# Altium PCB Annunciator.PcbDoc
Units mil, origin at the board's own origin, x right, y up, seen from the top; angles counter-clockwise.
Board outline 2739.72 x 2629.72 mil, 2 copper layers (Top Layer, Bottom Layer); 9 components, 15 nets, 120 pads, 0 vias.
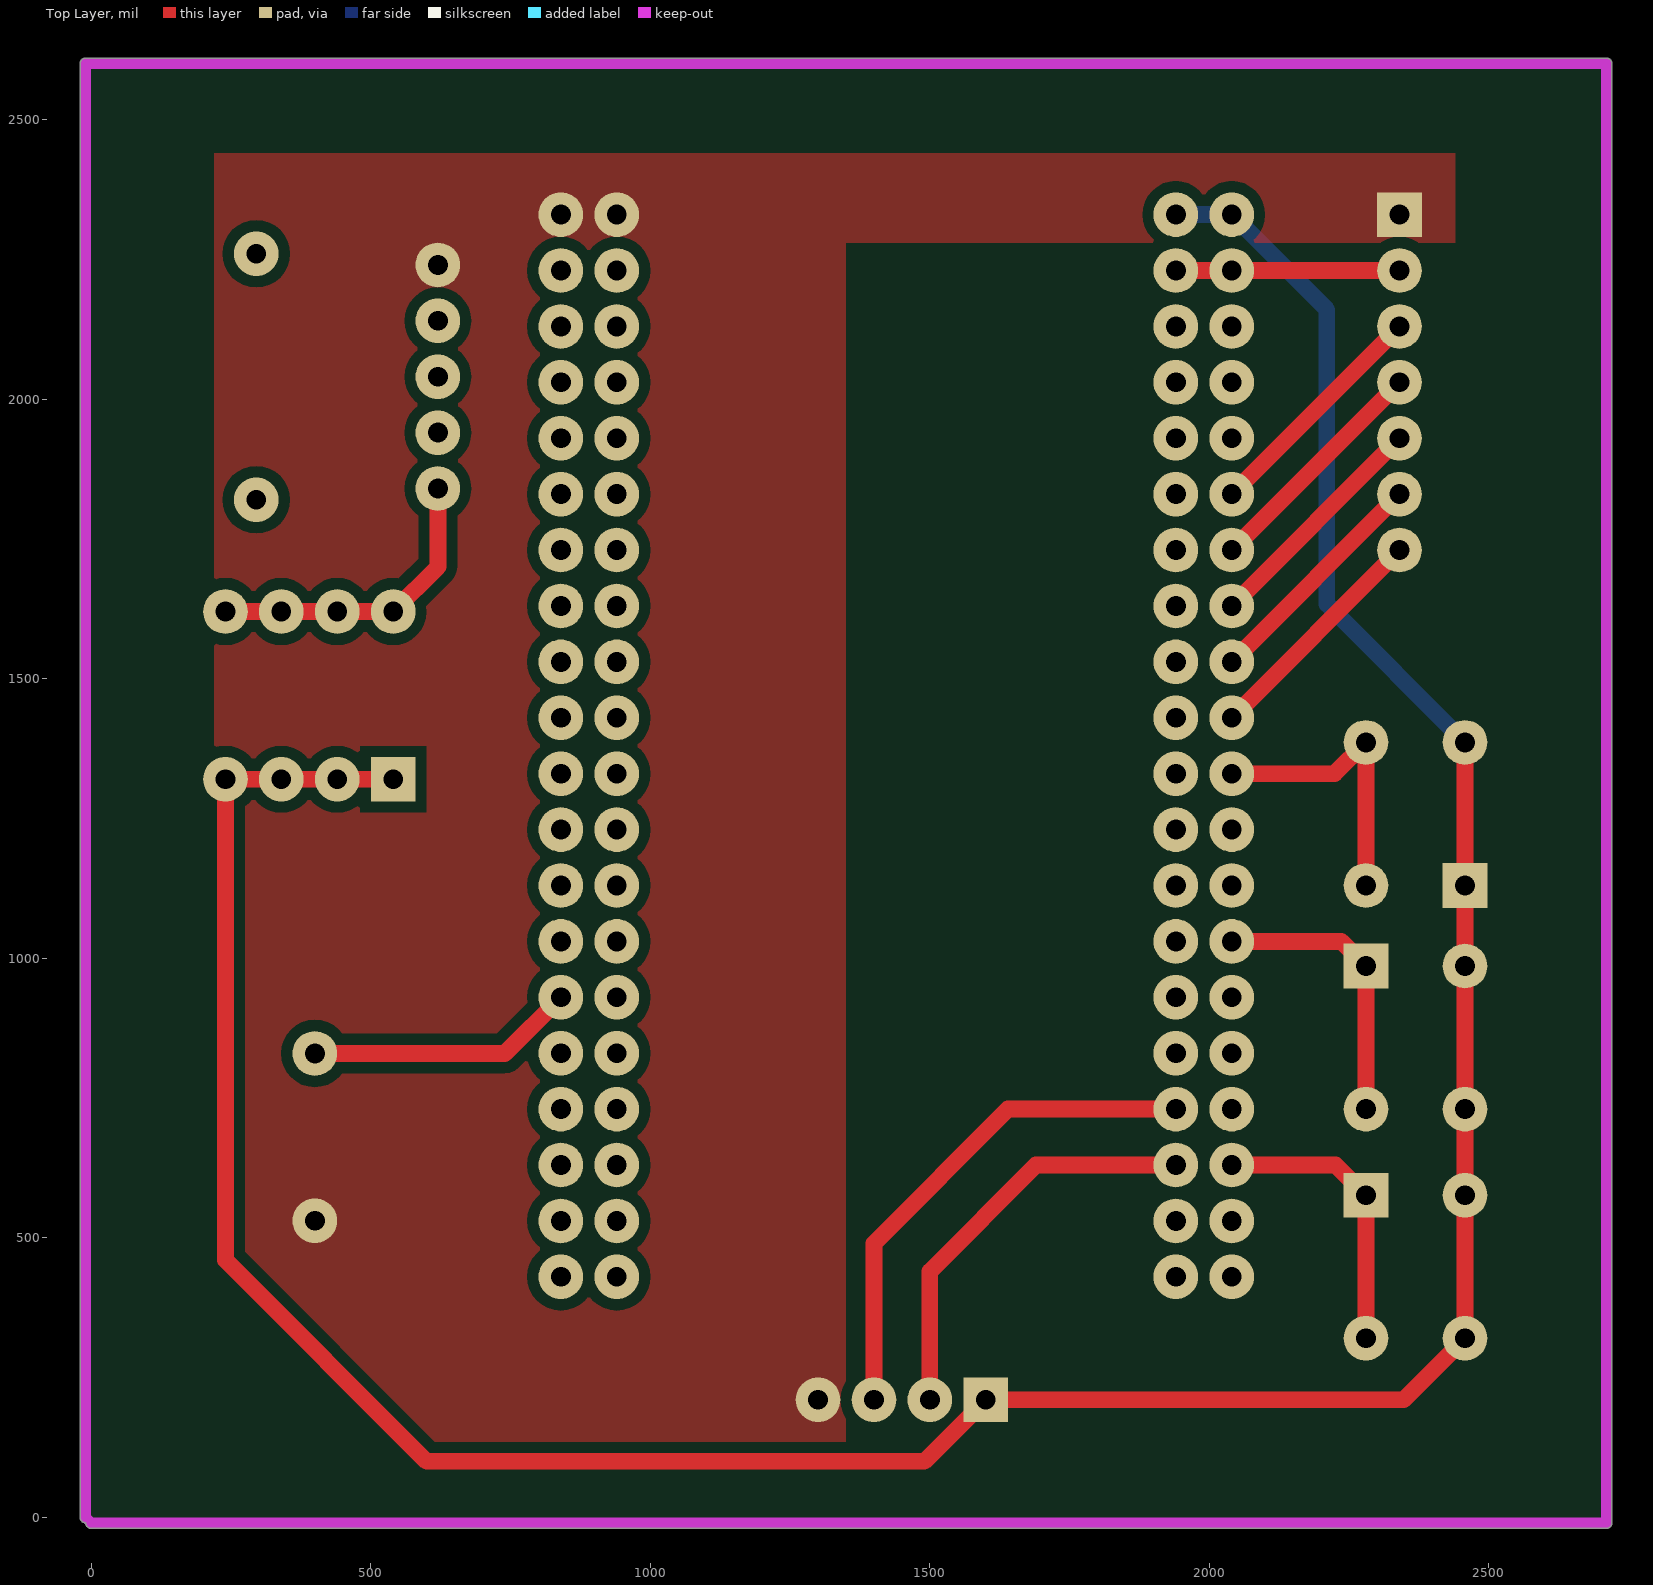
[diagram p0: Top Layer view]
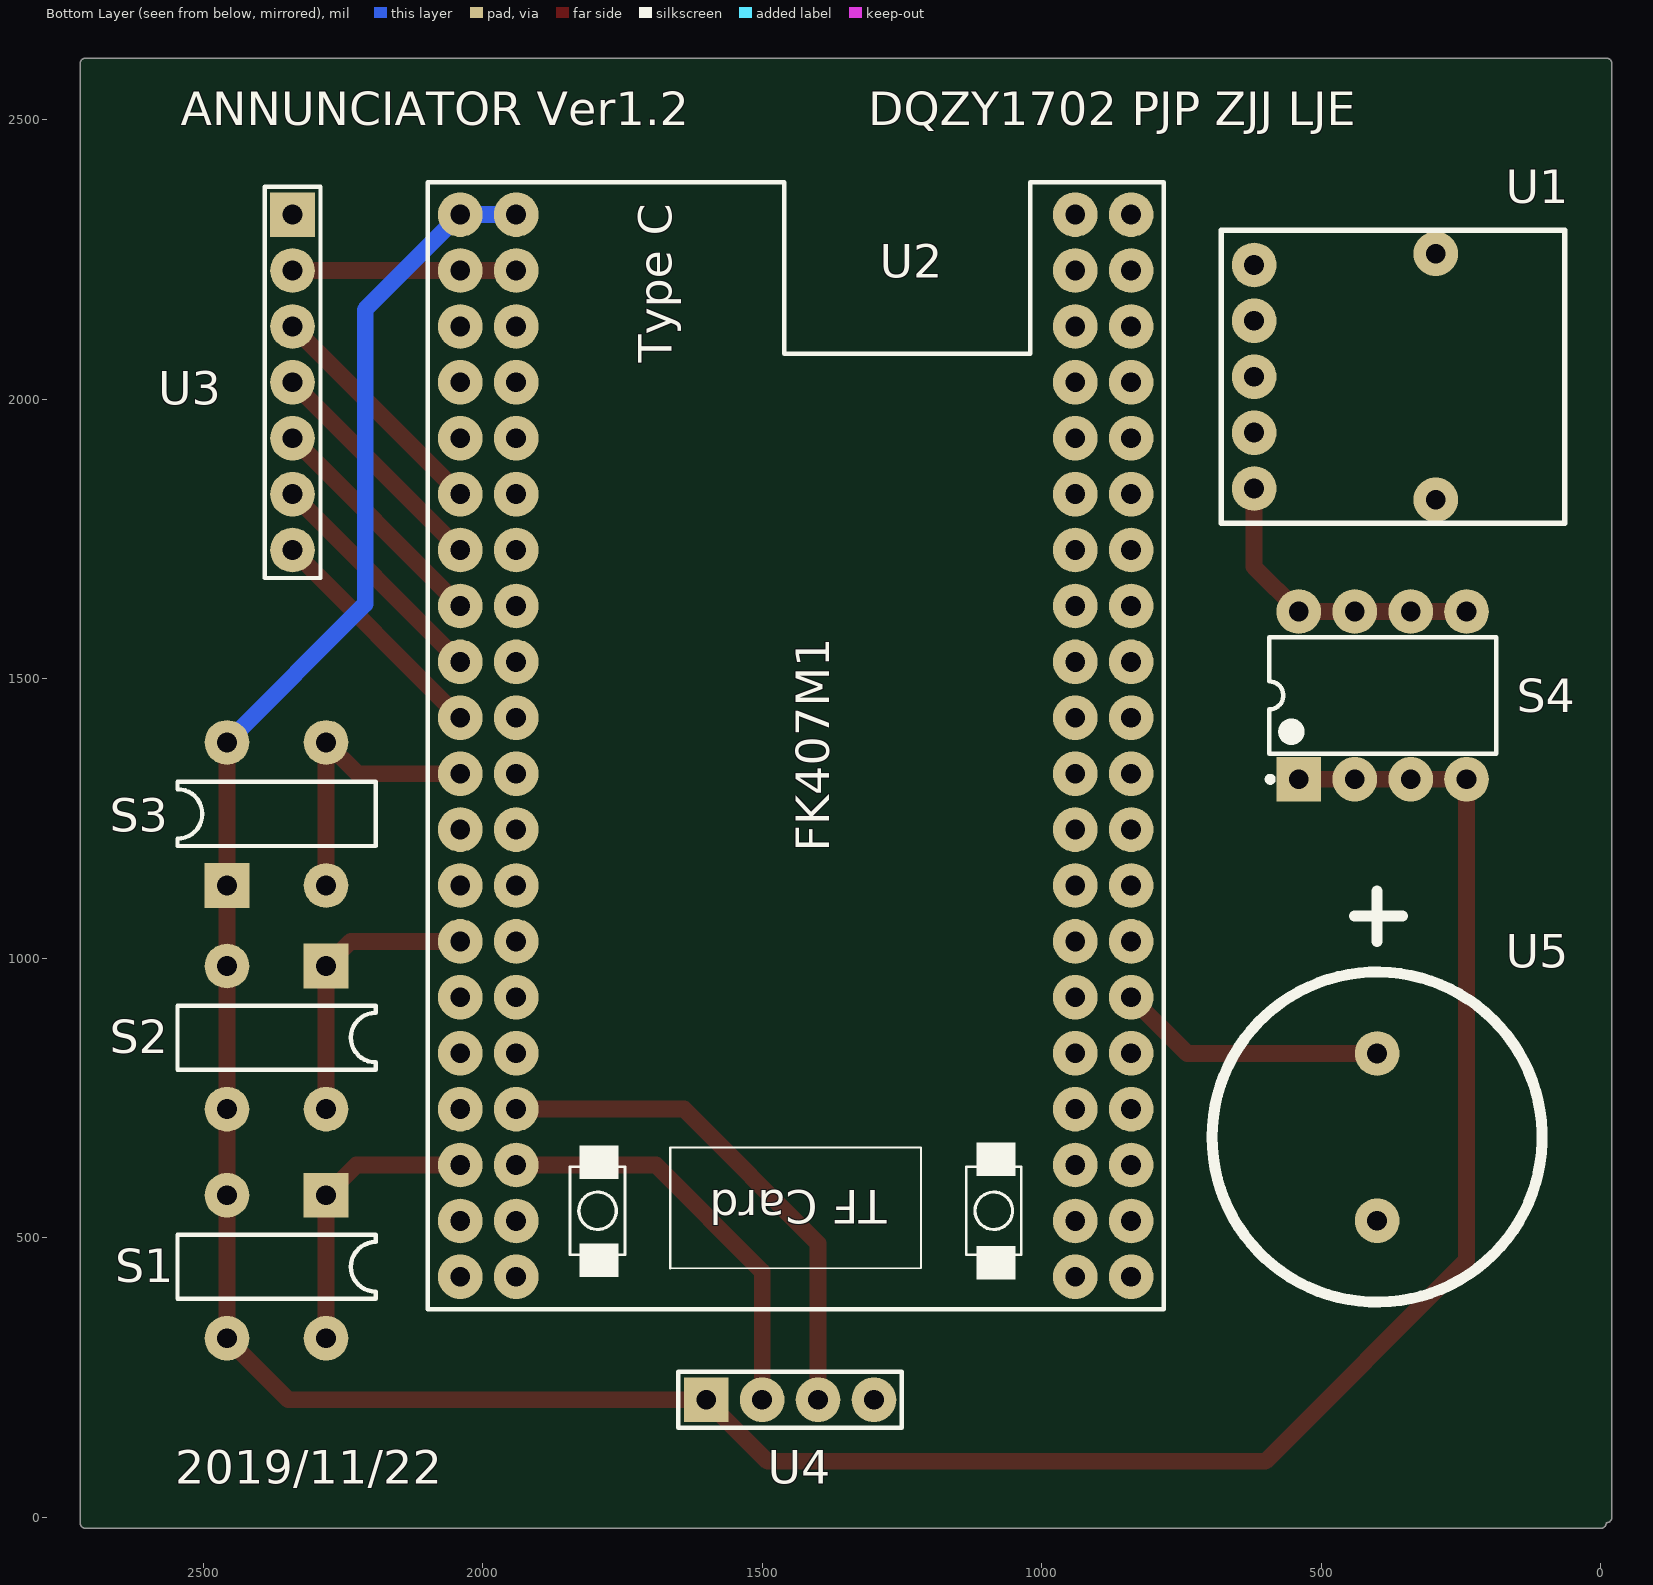
[diagram p1: Bottom Layer view, seen from below]

## Layer stack, top to bottom
Top Solder: solder mask 0.4, Solder Resist, Dk 3.5
Top Layer: signal copper 1.4
Dielectric 1: dielectric 12.6, FR-4, Dk 4.8
Bottom Layer: signal copper 1.4
Bottom Solder: solder mask 0.4, Solder Resist, Dk 3.5

## Board outline
-19.86,0 -19.86,2600 cw(c-10,2600) -10,2609.86 2710,2609.86 cw(c2710,2600) 2719.86,2600 2719.86,-10 cw(c2710,-10) 2710,-19.86 0,-19.86 cw(c0,-10) -9.86,-9.86 cw(c-10,0)

## Design rules (kind name [scope] priority, off if disabled: settings)
Clearance [All] p1: gap=10 ignorepadtopadclearanceinfootprint=FALSE except(0: Arc-Hole Track-Hole SMDPad-Hole THPad-Hole Via-Hole Fill-Hole Poly-Hole Region-Hole Text-Hole; 20: Arc-Fill Arc-Poly Arc-Region Track-Fill Track-Poly Track-Region SMDPad-Fill SMDPad-Poly SMDPad-Region THPad-Fill THPad-Poly THPad-Region)
ComponentClearance [All] p1: gap=0 collisioncheckmode=3 verticalgap=0 showdistances=FALSE
PolygonConnect [All] p1: connectstyle=Direct reliefconductorwidth=10 reliefentries=4 polygonreliefangle="90 Angle" airgapwidth=10
RoutingVias [All] p1: holewidth=28 width=50 viastyle="Through Hole" minholewidth=28 minwidth=50 maxholewidth=28 maxwidth=50
SolderMaskExpansion [All] p1: expansion=4
Width [All] p1: maxlimit=30 minlimit=5 preferedwidth=10
29 further rules are at their usual default settings.

## Components (designator, comment, footprint, x,y, rotation, side; value= is the part's Value field where it differs from the comment)
S1 "Button" Button-4Pin 2280,575.91 r270 bottom
S2 "Button" Button-4Pin 2280,985.91 r270 bottom
S3 "Button" Button-4Pin 2457.17,1130 r90 bottom
S4 "SW DIP-4" DIP-8 390,1470 r90 bottom
U1 "USB-TYPEB" "microB USB Breakout" 620,1840 r0 bottom
U2 "STM32F407VET6" FK407M1 1940,2330 r90 bottom
U3 "OLED12864" HDR1X7 2340,2330 r270 bottom
U4 "RCWL1601/HCSR04" HDR1X4 1600,210 r180 bottom
U5 "Buzzer" THDZ 400,680 r270 bottom

## Footprints (in the part's own frame and the unit in brackets; to place one, negate y for a bottom-side part, rotate by r counter-clockwise, add the part's x,y. Pads: shape width x height; smd on the part's side, far side on the other; paste and mask are expansions set on the pad)
Button-4Pin [mil]
  rect 80x80 hole 35.43: 1(0,0)
  round 80 hole 35.43: 2(0,-177.17) 3(255.91,-177.17) 4(255.91,0)
  silkscreen extent 71,-266 185,89
DIP-8 [mil] "DIP; 8 Leads; Row Spacing 7.62 mm; Pitch 2.54 mm"
  rect 80x80 hole 35.43: 1(-150,150)
  round 80 hole 35.43: 2(-150,50) 3(-150,-50) 4(-150,-150) 5(150,-150) 6(150,-50) 7(150,50) 8(150,150)
  silkscreen extent -155,-203 104,206, body extent -142,-203 142,203, height 200
FK407M1 [mil]
  round 80 hole 35.43: 1(0,-1000) 2(0,-1100) 3(-100,-1000) 4(-100,-1100) 5(-200,-1000) 6(-200,-1100) 7(-300,-1000) 8(-300,-1100) 9(-400,-1000) 10(-400,-1100) 11(-500,-1000) 12(-500,-1100) 13(-600,-1000) 14(-600,-1100) 15(-700,-1000) 16(-700,-1100) 17(-800,-1000) 18(-800,-1100) 19(-900,-1000) 20(-900,-1100) 21(-1000,-1000) 22(-1000,-1100) 23(-1100,-1000) 24(-1100,-1100) 25(-1200,-1000) 26(-1200,-1100) 27(-1300,-1000) 28(-1300,-1100) 29(-1400,-1000) 30(-1400,-1100) 31(-1500,-1000) 32(-1500,-1100) 33(-1600,-1000) 34(-1600,-1100) 35(-1700,-1000) 36(-1700,-1100) 37(-1800,-1000) 38(-1800,-1100) 39(-1900,-1000) 40(-1900,-1100) 41(0,100) 42(0,0) 43(-100,100) 44(-100,0) 45(-200,100) 46(-200,0) 47(-300,100) 48(-300,0) 49(-400,100) 50(-400,0) 51(-500,100) 52(-500,0) 53(-600,100) 54(-600,0) 55(-700,100) 56(-700,0) 57(-800,100) 58(-800,0) 59(-900,100) 60(-900,0) 61(-1000,100) 62(-1000,0) 63(-1100,100) 64(-1100,0) 65(-1200,100) 66(-1200,0) 67(-1300,100) 68(-1300,0) 69(-1400,100) 70(-1400,0) 71(-1500,100) 72(-1500,0) 73(-1600,100) 74(-1600,0) 75(-1700,100) 76(-1700,0) 77(-1800,100) 78(-1800,0) 79(-1900,100) 80(-1900,0)
  silkscreen extent -1958,-1158 58,158
HDR1X4 [mil] "Connector; Header; 4 Position"
  rect 80x80 hole 35.43: 1(0,0)
  round 80 hole 35.43: 2(100,0) 3(200,0) 4(300,0)
  silkscreen extent -50,-50 350,50
HDR1X7 [mil] "Connector; Header; 7 Position"
  rect 80x80 hole 35.43: 1(0,0)
  round 80 hole 35.43: 2(100,0) 3(200,0) 4(300,0) 5(400,0) 6(500,0) 7(600,0)
  silkscreen extent -50,-50 650,50
"microB USB Breakout" [mil]
  round 80 hole 35.43 mask+3.94: 1(0,0) 2(0,-100) 3(0,-200) 4(0,-300) 5(0,-400) 6(-324.8,-420) 7(-324.8,20)
  silkscreen extent -556,-462 59,62
THDZ [mil] "Buzzer"
  round 80 hole 35.43: GND(149.61,0) VCC(-149.61,0)
  silkscreen extent -440,-295 295,295

## Part data
S1 S2 S3: library part 4PinButton
S4: "DIP Switch, 4 Position, SPST", Code_IPC=SOIC127P600-8, Code_JEDEC=MS-012-AA, LatestRevisionDate=29-May-2009, LatestRevisionNote="IPC-7351 Footprint Added.", PackageDescription="8-Pin Small Outline Integrated Circuit 1.27 mm Pitch", PackageReference=SO8, PackageVersion=Dec-2002, Published=24-Mar-1999, Publisher="Altium Limited"
U1: library part HEAD7A
U2: library part FK407M1
U3: "OLED"
U4: "Ranging Module"
U5: "Active"

## Nets (pads, with @x,y where several pads share a name; then routed paths per layer and width w, separated by ;. In a path a pad name is that pad's centre, name@x,y a point inside that pad or via, vN(x,y) a via of type N, cw(c..) or ccw(c..) an arc to the next point about the centre after c; other vN are vias at no path point)
+3.3: U2.43 U2.44 U3.2 | length 400
  Top Layer w30: U2.44 U2.43 U3.2
+5: S1.2 S1.3 S2.2 S2.3 S3.1 S3.4 S4.1 S4.2 S4.3 S4.4 U2.41 U2.42 U4.1 | length 5900.2
  Top Layer w30: S4.1 S4.2 S4.3 S4.4 240,460 600,100 1490,100 U4.1 2347.17,210 S1.3 S1.2 S2.3 S2.2 S3.1 S3.4
  Bottom Layer w30: U2.42 U2.41 2210,2160 2210,1633.07 S3.4
B3: U2.74 U4.3 | length 919.4
  Top Layer w30: U4.3 1400,490 1640,730 U2.74
C10: U2.51 U3.3 | length 424.3
  Top Layer w30: U2.51 U3.3
C12: U2.53 U3.4 | length 424.3
  Top Layer w30: U2.53 U3.4
D1: U2.55 U3.5 | length 424.3
  Top Layer w30: U2.55 U3.5
D3: U2.57 U3.6 | length 424.3
  Top Layer w30: U2.57 U3.6
D5: U2.59 U3.7 | length 424.3
  Top Layer w30: U2.59 U3.7
D6: U2.76 U4.2 | length 748.7
  Top Layer w30: U4.2 1500,440 1690,630 U2.76
GND: U1.5 U2.1 U2.2 U3.1 U4.4 U5.GND
NetS1_1: S1.1 S1.4 U2.75 | length 518.3
  Top Layer w30: U2.75 2225.91,630 S1.1 S1.4
NetS2_1: S2.1 S2.4 U2.67 | length 514.2
  Top Layer w30: U2.67 2235.91,1030 S2.1 S2.4
NetS3_2: S3.2 S3.3 U2.61 | length 519.1
  Top Layer w30: U2.61 2224.09,1330 S3.3 S3.2
NetS4_5: S4.5 S4.6 S4.7 S4.8 U1.1 | length 553.1
  Top Layer w30: S4.5 S4.6 S4.7 S4.8 620,1700 U1.1
NetU2_30: U2.30 U5.VCC | length 481.6
  Top Layer w30: U5.VCC 739.61,829.61 U2.30
pads on no net: U1.2 U1.3 U1.4 U1.6 U1.7 U2.3 U2.4 U2.5 U2.6 U2.7 U2.8 U2.9 U2.10 U2.11 U2.12 U2.13 U2.14 U2.15 U2.16 U2.17 U2.18 U2.19 U2.20 U2.21 U2.22 U2.23 U2.24 U2.25 U2.26 U2.27 U2.28 U2.29 U2.31 U2.32 U2.33 U2.34 U2.35 U2.36 U2.37 U2.38 U2.39 U2.40 U2.45 U2.46 U2.47 U2.48 U2.49 U2.50 U2.52 U2.54 U2.56 U2.58 U2.60 U2.62 U2.63 U2.64 U2.65 U2.66 U2.68 U2.69 U2.70 U2.71 U2.72 U2.73 U2.77 U2.78 U2.79 U2.80
copper on no net: | length 0.6
  Top Layer w30: 839.61,829.61 840,830

## Polygon pours and split planes (outlines as drawn)
GND on Top Layer "GND_L01_P012" (solid, remove dead copper, pour order 12): 220,2440 2440,2440 2440,2280 1350,2280 1350,130 220,130

## Keep-outs
Top Layer:
  lines w19.68: -10,0 0,-10 2710,-10 2710,2600 -10,2600 -10,0

## Silkscreen, mask and mechanical layers (free items; w line width, h text height)
Bottom Overlay:
  text "DQZY1702 PJP ZJJ LJE" at 1310,2490 h60
  text "ANNUNCIATOR Ver1.2" at 2540,2490 h60
  text "2019/11/22" at 2550,60 h60

## Text inside footprints (layer, text, board x,y; h text height)
U2: Bottom Overlay "FK407M1" at 1380,1190 h60 r270; Bottom Overlay "TF Card" at 1277,585 h60 r180; Bottom Overlay "Type C" at 1662,2065 h60 r270